# Altium PCB PCB1.PcbDoc
Units mm, origin at the board's own origin, x right, y up, seen from the top; angles counter-clockwise.
Board outline 45.09 x 28.83 mm, 2 copper layers (Top Layer, Bottom Layer); 29 components, 22 nets, 96 pads, 14 vias.
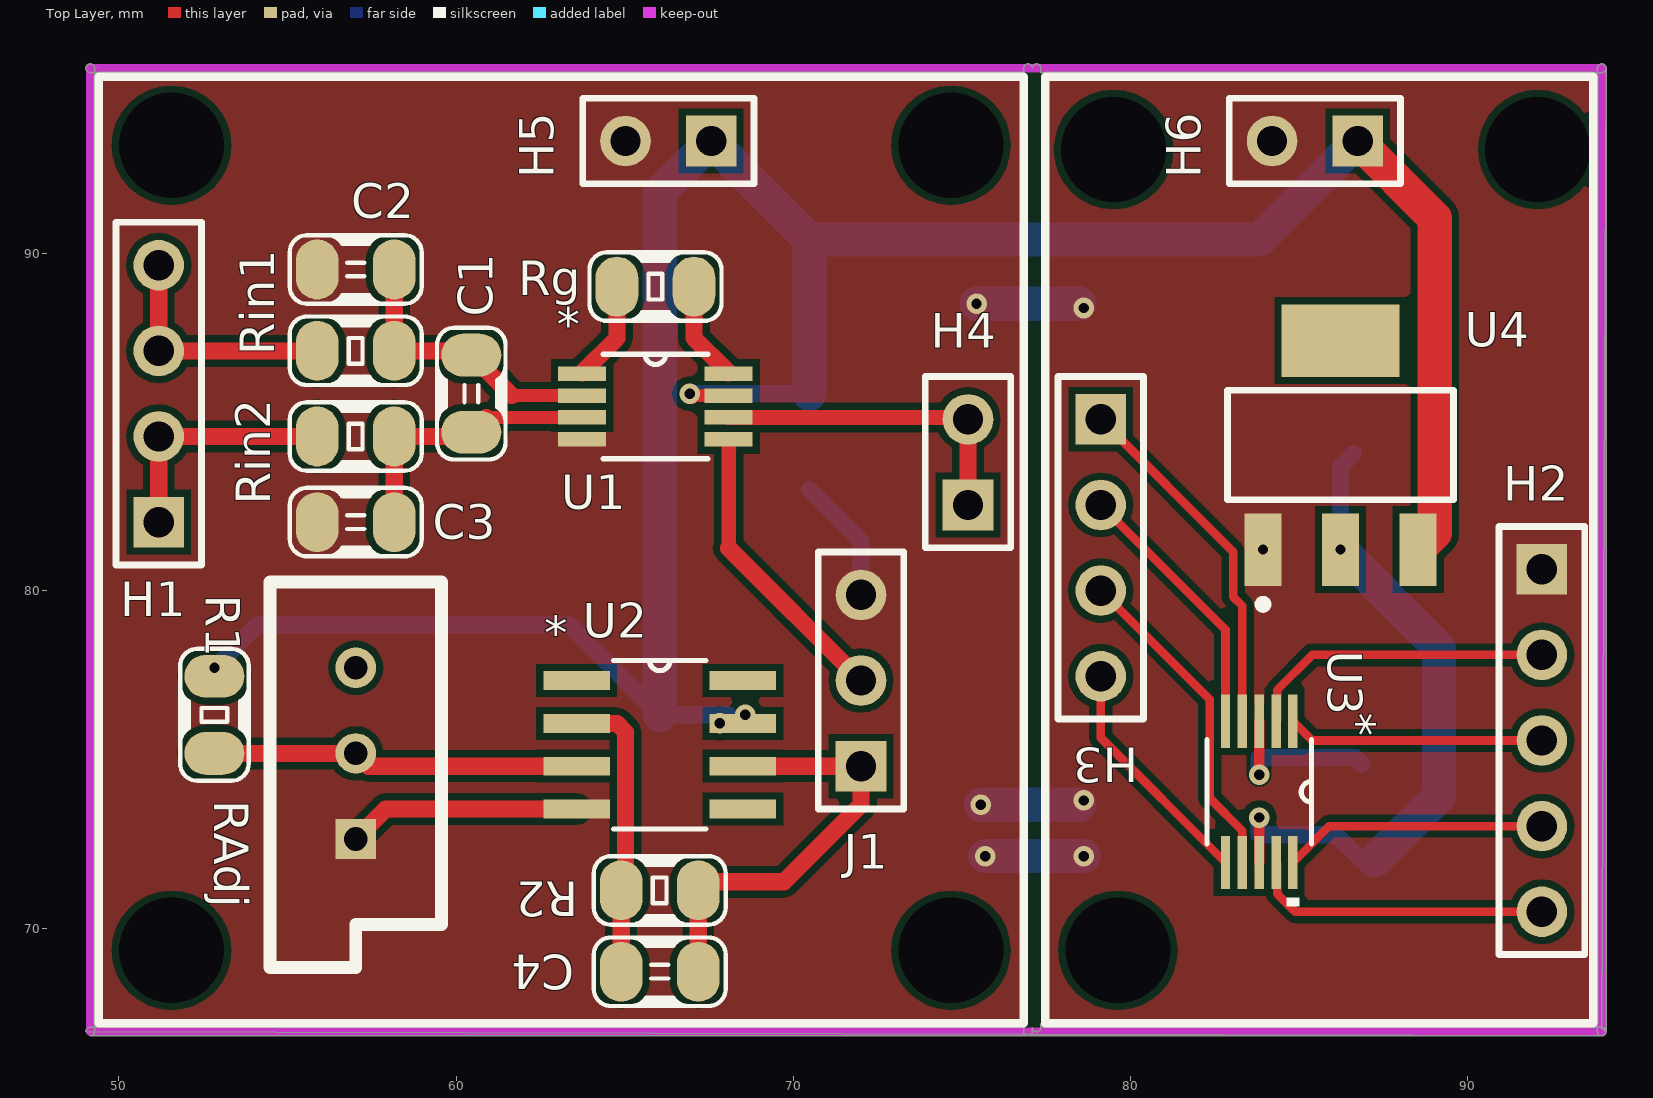
[diagram p0: Top Layer view]
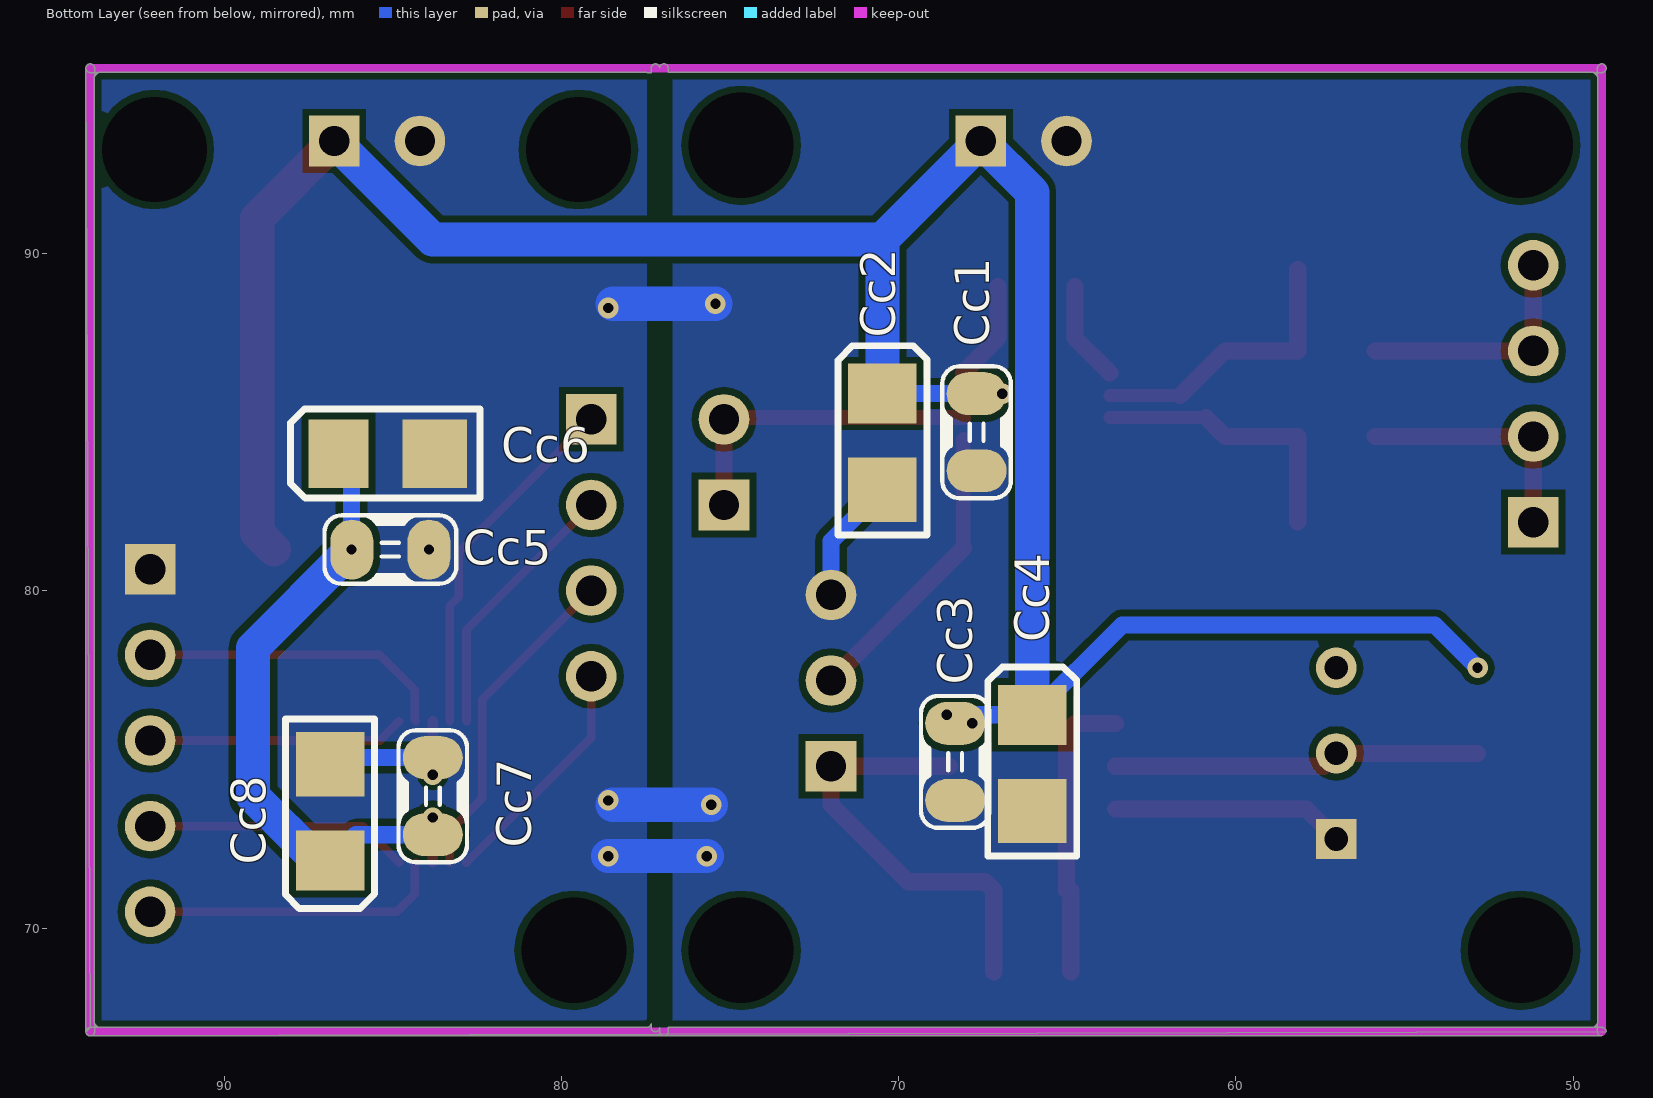
[diagram p1: Bottom Layer view, seen from below]
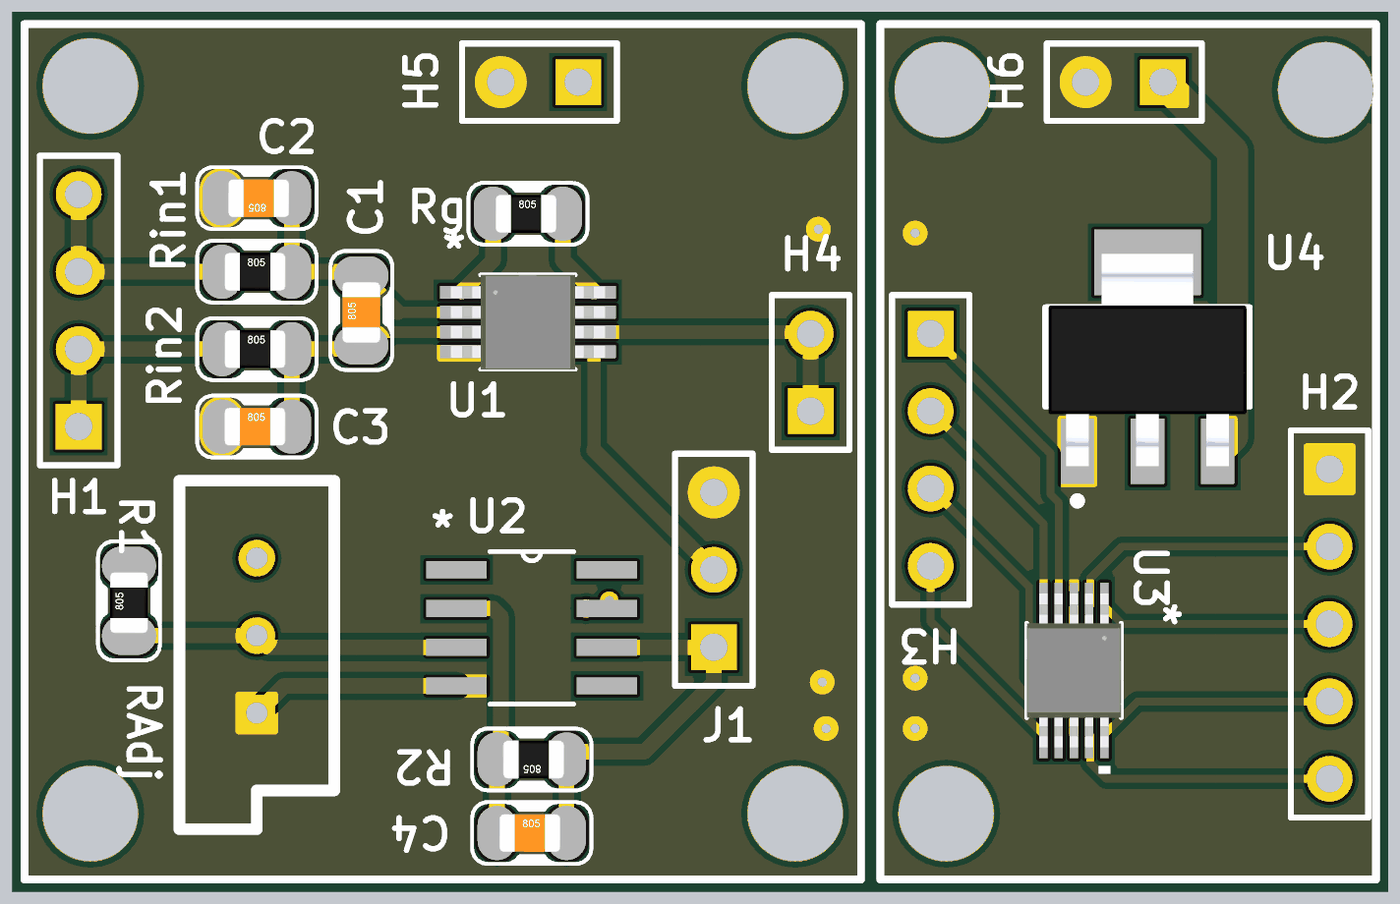
[diagram p2: 3D render of the assembled board from above, using the file's embedded part models]
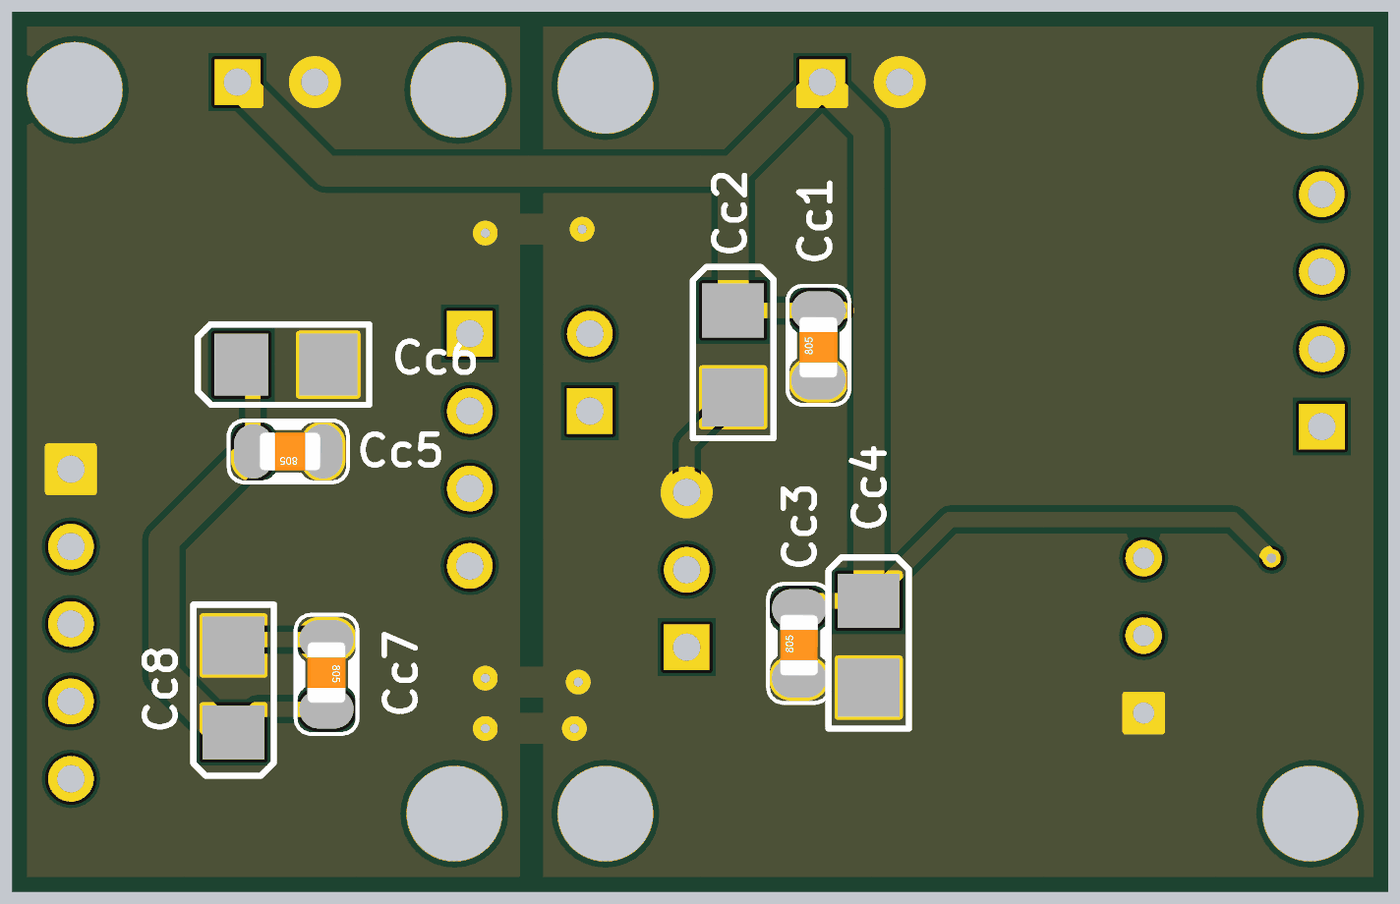
[diagram p3: 3D render of the assembled board from below, using the file's embedded part models]

## Layer stack, top to bottom
Top Solder: solder mask 0.0102, Solder Resist, Dk 3.5
Top Layer: signal copper 0.0356
Dielectric 1: dielectric 0.32, FR-4, Dk 4.8
Bottom Layer: signal copper 0.0356
Bottom Solder: solder mask 0.0102, Solder Resist, Dk 3.5

## Board outline
49.022,66.929 cw(c49.149,66.929) 49.149,67.056 49.389,67.056 ccw(c49.403,67.183) 49.403,67.056 76.835,67.056 76.835,66.929 ccw(c76.962,66.929) 76.962,66.802 ccw(c76.962,66.929) 77.089,66.929 77.089,67.042 ccw(c77.216,67.056) 77.343,67.056 77.343,67.169 ccw(c77.47,67.183) 77.456,67.056 ccw(c77.47,67.183) 77.47,67.056 93.726,67.056 ccw(c93.726,67.183) 93.74,67.056 ccw(c93.726,67.183) 93.853,67.169 ccw(c93.726,67.183) 93.853,67.183 93.853,95.25 ccw(c93.726,95.25) 93.853,95.264 93.853,95.504 cw(c93.98,95.504) 93.98,95.631 cw(c93.98,95.504) 94.107,95.504 cw(c93.98,95.504) 93.98,95.377 93.74,95.377 cw(c93.726,95.25) 93.853,95.264 93.74,95.377 ccw(c93.726,95.25) 93.726,95.377 77.47,95.377 ccw(c77.47,95.25) 77.456,95.377 77.343,95.377 77.343,95.504 ccw(c77.216,95.504) 77.216,95.631 ccw(c77.216,95.504) 77.089,95.514 ccw(c76.962,95.504) 76.962,95.631 ccw(c76.962,95.504) 76.835,95.504 76.835,95.377 49.403,95.377 ccw(c49.403,95.25) 49.389,95.377 ccw(c49.403,95.25) 49.276,95.264 49.276,95.504 ccw(c49.149,95.504) 49.149,95.631 ccw(c49.149,95.504) 49.022,95.504 ccw(c49.149,95.504) 49.149,95.377 49.389,95.377 49.276,95.264 ccw(c49.403,95.25) 49.276,95.25 49.276,67.183 ccw(c49.403,67.183) 49.276,67.169 ccw(c49.403,67.183) 49.389,67.056 49.276,67.169 49.276,66.929 cw(c49.149,66.929) 49.149,66.802 93.98,66.802 ccw(c93.98,66.929) 94.107,66.929 94.107,95.504 93.98,67.056 cw(c93.98,66.929) 94.107,66.929 93.98,67.056 93.74,67.056 93.853,67.169 93.853,66.929 ccw(c93.98,66.929)

## Design rules (kind name [scope] priority, off if disabled: settings)
Clearance [All] p1: gap=0.203
PolygonConnect [All] p1: connectstyle=Direct reliefconductorwidth=0.254 reliefentries=4 polygonreliefangle="90 Angle" airgapwidth=0.254
RoutingVias [All] p1: holewidth=0.711 width=1.27 viastyle="Through Hole" minholewidth=0.711 minwidth=1.27 maxholewidth=0.711 maxwidth=1.27
SolderMaskExpansion [All] p1: expansion=0.102
Width [All] p1: maxlimit=1.016 minlimit=0.254 preferedwidth=0.254 minimp=50.000000 maximp=50.000000 favimp=50.000000
30 further rules are at their usual default settings.

## Components (designator, comment, footprint, x,y, rotation, side; value= is the part's Value field where it differs from the comment)
C1 "Cap" 0805C 60.452,84.709 r90 top
C2 "Cap" 0805C 58.166,89.535 r180 top
C3 "Cap" 0805C 55.88,82.042 r0 top
C4 "Cap" 0805C 64.897,68.707 r0 top
Cc1 "Cap" 0805C 67.691,83.566 r90 bottom
Cc2 "Cap2" CAP_SMD_3216 70.485,85.852 r270 bottom
Cc3 "Cap" 0805C 68.326,73.787 r90 bottom
Cc4 "Cap2" CAP_SMD_3216 66.04,76.327 r270 bottom
Cc5 "Cap" 0805C 83.933,81.228 r0 bottom
Cc6 "Cap2" CAP_SMD_3216 86.614,84.074 r180 bottom
Cc7 "Cap" 0805C 83.82,75.057 r270 bottom
Cc8 "Cap2" CAP_SMD_3216 86.868,72.009 r90 bottom
H1 "Header 4" HDR1X4 51.181,82.042 r90 top
H2 "Header 5" HDR1X5 92.202,80.645 r270 top
H3 "Header 4" HDR1X4 79.121,85.09 r270 top
H4 "Header 2" HDR1X2 75.184,82.55 r90 top
H5 "Header 2" HDR1X2 67.564,93.345 r180 top
H6 "Header 2" HDR1X2 86.741,93.345 r180 top
J1 "Header 3" HDR1X3 72.009,74.803 r90 top
R1 "Res2" 0805R 52.832,75.184 r90 top
R2 "Res2" 0805R 67.183,71.12 r180 top
RAdj "Res Adj2" PRS_POT 57.023,77.724 r270 top
Rg "Res2" 0805R 64.77,89.027 r0 top
Rin1 "Rin1" 0805R 55.88,87.122 r0 top
Rin2 "Res2" 0805R 55.88,84.582 r0 top
U1 "INA333_DGK_8" DGK8 65.913,85.471 r0 top
U2 "OPA330" D8 66.04,75.438 r0 top
U3 "ADS1118_DGS_10" DGS10 83.82,74.041 r270 top
U4 "1117-xx" SOT-223_ 86.233,84.328 r0 top

## Footprints (in the part's own frame and the unit in brackets; to place one, negate y for a bottom-side part, rotate by r counter-clockwise, add the part's x,y. Pads: shape width x height; smd on the part's side, far side on the other; paste and mask are expansions set on the pad)
0805C [mil] "0805封装电容"
  oval 50x70 smd: 1(0,0) 2(90,0)
  silkscreen extent -32,-40 122,40, body extent 3,-25 82,25, height 30
0805R [mil] "0805封装电阻"
  oval 50x70 smd: 1(0,0) 2(90,0)
  silkscreen extent -32,-40 122,40, body extent 3,-25 82,25, height 30
CAP_SMD_3216 [mil] "贴片钽电容，10uF"
  rect 70x80 smd: 1(0,0)
  rect 75x80 smd: 2(112.2,0)
  silkscreen extent -56,-52 165,52, body extent -11,-35 123,35, height 63
D8 [mil]
  rect 78x22 smd: 1(-97,75) 2(-97,25) 3(-97,-25) 4(-97,-75) 5(97,-75) 6(97,-25) 7(97,25) 8(97,75)
  silkscreen extent -54,-98 54,98
DGK8 [mil]
  rect 56x17 smd: 1(-85.5,38.39) 2(-85.5,12.8) 3(-85.5,-12.8) 4(-85.5,-38.39) 5(85.5,-38.39) 6(85.5,-12.8) 7(85.5,12.8) 8(85.5,38.39)
  silkscreen extent -61,-61 61,61, body extent -100,-61 100,61, height 43
DGS10 [mil]
  rect 62x11 smd: 1(-82.5,39.37) 2(-82.5,19.68) 3(-82.5,0) 4(-82.5,-19.68) 5(-82.5,-39.37) 6(82.5,-39.37) 7(82.5,-19.68) 8(82.5,0) 9(82.5,19.68) 10(82.5,39.37)
  silkscreen extent -61,-61 134,61, body extent -100,-61 100,61, height 43
HDR1X2 [mm] "Connector; Header; 2 Position"
  rect 1.5x1.5 hole 0.9: 1(0,0)
  round 1.5 hole 0.9: 2(2.54,0)
  silkscreen extent -1.27,-1.27 3.81,1.27
HDR1X3 [mm] "Connector; Header; 3 Position"
  rect 1.5x1.5 hole 0.9: 1(0,0)
  round 1.5 hole 0.9: 2(2.54,0) 3(5.08,0)
  silkscreen extent -1.27,-1.27 6.35,1.27
HDR1X4 [mm] "Connector; Header; 4 Position"
  rect 1.5x1.5 hole 0.9: 1(0,0)
  round 1.5 hole 0.9: 2(2.54,0) 3(5.08,0) 4(7.62,0)
  silkscreen extent -1.27,-1.27 8.89,1.27
HDR1X5 [mm] "Connector; Header; 5 Position"
  rect 1.5x1.5 hole 0.9: 1(0,0)
  round 1.5 hole 0.9: 2(2.54,0) 3(5.08,0) 4(7.62,0) 5(10.16,0)
  silkscreen extent -1.27,-1.27 11.43,1.27
PRS_POT [mm] "电位器"
  rect 1.2x1.2 hole 0.7: 1(5.08,0)
  round 1.2 hole 0.7: 2(2.54,0) 3(0,0)
  silkscreen extent -2.54,-2.54 8.89,2.54, body extent -2.64,-2.64 7.52,2.64, height 10.5
SOT-223_ [mm] "SOT-223/SC-73; 4 Leads; Body 6.7 x 7.3 mm, inc. leads (LxW max)"
  rect 1.1x2.15 smd: 1(-2.3,-3.1) 2(0,-3.1) 3(2.3,-3.1)
  rect 3.5x2.15 smd: 4(0,3.1)
  silkscreen extent -3.35,-4.85 3.35,1.63, body extent -3.25,-3.58 3.25,3.38, height 1.65

## Part data
C1 C2 C3 C4 Cc1 Cc2 Cc3 Cc4 Cc5 Cc6 Cc7 Cc8: "Capacitor"
H1 H3: "Header, 4-Pin"
H2: "Header, 5-Pin"
H4 H5 H6: "Header, 2-Pin"
J1: "Header, 3-Pin"
R1 R2 Rg Rin2: "Resistor"
RAdj: "Variable Resistor"
Rin1: library part Res2, "Resistor"
U1 U3: "Imported"
U2: library part OPA691_D_8, "Imported"
U4: "稳压芯片"

## Free pads (board coordinates)
  round 1.524 hole 3.12: 2(51.562,93.218) 3(74.676,93.218) 4(74.676,69.342) 5(51.562,69.342) 6(79.629,69.342) 7(79.502,93.091) 8(92.075,93.091)

## Via types
v1: diameter 0.61, hole 0.305, Top Layer to Bottom Layer, 14 vias

## Nets (pads, with @x,y where several pads share a name; then routed paths per layer and width w, separated by ;. In a path a pad name is that pad's centre, name@x,y a point inside that pad or via, vN(x,y) a via of type N, cw(c..) or ccw(c..) an arc to the next point about the centre after c; other vN are vias at no path point)
3.3: Cc5.2 Cc6.1 Cc7.2 Cc8.1 U3.8 U4.2 | length 19.8
  Top Layer w0.305: U3.8 v1(83.82,73.279)
  Bottom Layer w0.508: v1(83.82,73.279) Cc7.2 86.106,72.771 Cc8.1 Cc8.1@87.249,72.009 ; v1(86.233,81.228) 86.233,83.693 Cc6.1
  Bottom Layer w1.016: v1(86.233,81.228) 89.154,78.307 89.154,73.914 Cc8.1@87.249,72.009
+5V: Cc1.2 Cc2.1 Cc3.2 Cc4.1 H5.1 H6.1 R1.2 U1.7 U2.7 U4.3 | length 79.1
  Top Layer w0.381: v1@66.985,85.796 U1.7
  Top Layer w0.508: v1(66.929,85.852) v1@66.985,85.796
  Top Layer w1.016: H6.1 89.027,91.059 89.027,81.722 U4.3
  Bottom Layer w0.508: v1(52.832,77.724) 54.102,78.994 63.373,78.994 Cc4.1 68.072,76.327 Cc3.2 ; v1(66.929,85.852) Cc1.2 Cc2.1
  Bottom Layer w1.016: Cc4.1 66.04,91.821 H5.1 70.485,90.424 ; Cc2.1 70.485,90.424 ; H6.1 83.82,90.424 70.485,90.424
  other v1: 67.818,76.073 68.58,76.327
AIN0: H3.1 U3.4 | length 10.7
  Top Layer w0.254: H3.1 83.053,81.158 83.053,79.823 83.32,79.556 U3.4
AIN1: H3.2 U3.5 | length 7.9
  Top Layer w0.254: H3.2 82.82,78.851 U3.5
AIN2: H3.3 U3.7 | length 9.8
  Top Layer w0.254: H3.3 82.35,76.781 82.35,73.851 83.32,72.881 U3.7
AIN3: H3.4 U3.6 | length 7.1
  Top Layer w0.254: H3.4 79.121,75.644 U3.6
GND: C2.2 C3.1 Cc1.1 Cc2.2 Cc3.1 Cc4.2 Cc5.1 Cc6.2 Cc7.1 Cc8.2 H2.1 H5.2 H6.2 J1.3 RAdj.1 U1.4 U2.4 U3.3 U4.1 | length 24.8
  Top Layer w0.305: v1(83.82,74.549) U3.3
  Top Layer w0.508: RAdj.1 57.912,73.533 U2.4
  Bottom Layer w0.508: Cc2.2 72.009,81.478 J1.3 ; v1(83.82,74.549) Cc7.1 86.67,75.057 Cc8.2
  Bottom Layer w1.016: v1(75.438,88.519) v1@78.486,88.519 ; v1(75.565,73.66) v1@78.486,73.66 ; v1(75.692,72.136) v1(78.613,72.136)
  other v1: 78.613,73.787 83.933,81.228 78.613,88.392
IN+: H1.1 H1.2 Rin2.1 | length 7.2
  Top Layer w0.508: H1.1 H1.2 Rin2.1
IN-: H1.3 H1.4 Rin1.1 | length 7.2
  Top Layer w0.508: H1.4 H1.3 Rin1.1
NetC1_1: C1.1 C3.2 Rin2.2 U1.3 | length 8.3
  Top Layer w0.381: C1.1@60.889,85.146 U1.3
  Top Layer w0.508: C3.2 Rin2.2 60.325,84.582 C1.1 C1.1@60.889,85.146
NetC1_2: C1.2 C2.1 Rin1.2 U1.2 | length 8.5
  Top Layer w0.381: 61.651,85.796 U1.2
  Top Layer w0.508: C2.1 Rin1.2 60.325,87.122 C1.2 61.651,85.796
NetC4_1: C4.1 R2.2 U2.2 | length 8.8
  Top Layer w0.508: U2.2 64.77,76.073 65.024,75.819 65.024,71.12 R2.2 C4.1
NetH2_2: H2.2 U3.2 | length 9.2
  Top Layer w0.254: U3.2 84.35,76.167 84.35,77.061 85.394,78.105 H2.2
NetH2_3: H2.3 U3.1 | length 7.6
  Top Layer w0.254: U3.1 85.392,75.565 H2.3
NetH2_4: H2.4 U3.10 | length 7.8
  Top Layer w0.254: U3.10 85.9,73.025 H2.4
NetH2_5: H2.5 U3.9 | length 9
  Top Layer w0.254: U3.9 84.35,71.915 84.35,71.021 84.886,70.485 H2.5
NetR1_1: R1.1 RAdj.2 U2.3 | length 10.9
  Top Layer w0.508: R1.1 RAdj.2 57.404,74.803 U2.3
NetRg_1: Rg.1 U1.1 | length 3
  Top Layer w0.508: U1.1@63.741,86.469 64.77,87.498 Rg.1
NetRg_2: Rg.2 U1.8 | length 3
  Top Layer w0.508: Rg.2 67.056,87.498 U1.8@68.085,86.469
VOUT: H4.1 H4.2 U1.6 | length 9.7
  Top Layer w0.457: U1.6 H4.2@75.128,85.146
  Top Layer w0.508: H4.2@75.128,85.146 H4.2 H4.1
VREF: J1.2 U1.5 | length 8.8
  Top Layer w0.432: 68.085,81.267 U1.5
  Top Layer w0.508: 68.085,81.267 J1.2
VREF1: C4.2 J1.1 R2.1 U2.6 | length 12.9
  Top Layer w0.508: C4.2 R2.1 67.437,71.374 69.723,71.374 72.009,73.66 J1.1 U2.6
pads on no net: RAdj.3 U2.1 U2.5 U2.8 U4.4

## Polygon pours and split planes (outlines as drawn)
GND on Bottom Layer "GND" (solid, pour order 12): 77.47,95.25 93.726,95.25 93.726,67.183 77.597,67.183 77.47,67.31
GND on Bottom Layer "GND" (solid, pour order 6): 49.403,95.25 76.708,95.25 76.708,67.31 76.708,67.183 49.403,67.183
GND on Top Layer "GND" (solid, pour order 10): 77.47,95.25 93.726,95.25 93.726,67.183 93.599,67.31 77.47,67.31
GND on Top Layer "GND" (solid, pour order 8): 49.53,95.25 76.708,95.25 76.708,67.183 49.403,67.183

## Keep-outs
Keep-Out Layer:
  lines w0.254: 49.149,66.929 49.149,95.504 93.98,95.504 93.98,66.929 49.149,66.929

## Silkscreen, mask and mechanical layers (free items; w line width, h text height)
Top Overlay:
  lines w0.254: 49.403,67.183 49.403,95.25 76.835,95.25 76.835,67.183 49.403,67.183 ; 77.47,67.183 77.47,95.25 93.726,95.25 93.726,67.183 77.47,67.183
Mechanical 1:
  lines w1.2: 25.4,25.4 25.4,127 177.8,127 177.8,25.4 25.4,25.4

## Text inside footprints (layer, text, board x,y; h text height)
U1: Top Overlay "*" at 62.992,87.376 h1.02; Mechanical 13 "*" at 62.992,87.376 h1.02
U2: Top Overlay "*" at 62.611,78.232 h1.02; Mechanical 13 "*" at 62.611,78.232 h1.02
U3: Top Overlay "*" at 86.242,76.391 h1.02 r270; Mechanical 13 "*" at 86.242,76.391 h1.02 r270